# Altium PCB AMS1117 breakout.PcbDoc
Units mm, origin at the board's own origin, x right, y up, seen from the top; angles counter-clockwise.
Board outline 152.4 x 101.6 mm, 2 copper layers (Top Layer, Bottom Layer); 6 components, 4 nets, 13 pads, 0 vias.
Unrouted connection lines stored in the file: 9.
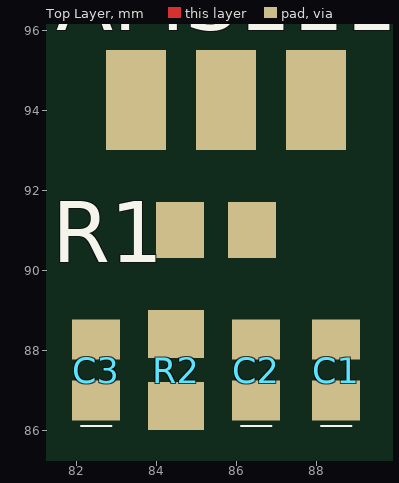
[diagram p0: Top Layer view]
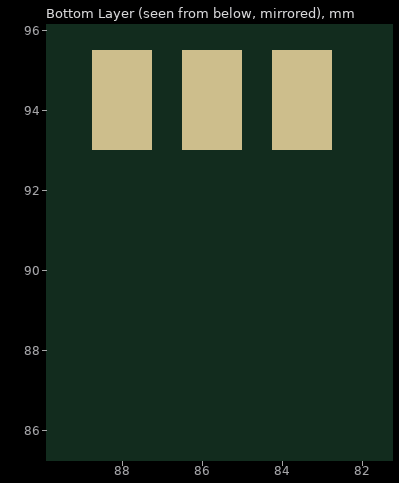
[diagram p1: Bottom Layer view, seen from below]

## Layer stack, top to bottom
Top Solder: solder mask 0.0102, Solder Resist, Dk 3.5
Top Layer: signal copper 0.0356
Dielectric 1: dielectric 0.32, FR-4, Dk 4.8
Bottom Layer: signal copper 0.0356
Bottom Solder: solder mask 0.0102, Solder Resist, Dk 3.5

## Board outline
25.4,25.4 177.8,25.4 177.8,127 25.4,127

## Design rules (kind name [scope] priority, off if disabled: settings)
Clearance [All] p1: gap=0.254
PolygonConnect [All] p1: connectstyle=Relief reliefconductorwidth=0.254 reliefentries=4 polygonreliefangle="90 Angle" airgapwidth=0.254
RoomDefinition "AMS1117 breakout" [InComponentClass('AMS1117 breakout')] p1: confinementstyle=ConfineIn formatcopy=TRUE lockcomponents=FALSE outline 178.943,26.797 189.23,26.797 189.23,37.846 178.943,37.846
RoutingVias [All] p1: holewidth=0.711 width=1.27 viastyle="Through Hole" minholewidth=0.711 minwidth=1.27 maxholewidth=0.711 maxwidth=1.27
SolderMaskExpansion [All] p1: expansion=0.102
UnpouredPolygon [All] p1: allowunpoured=FALSE
Width [All] p1: maxlimit=0.254 minlimit=0.254 preferedwidth=0.254
29 further rules are at their usual default settings.

## Components (designator, comment, footprint, x,y, rotation, side; value= is the part's Value field where it differs from the comment)
AMS1117 "T1" SOT-223 82.5,93.5 r0 top
C1 "22uF" 0805-C 88.5,87.5 r90 top
C2 "22uF" 0805-C 86.5,87.5 r90 top
C3 "10uF" 0805-C 82.5,87.5 r90 top
R1 "47k" 0805-R 85.5,91 r0 top
R2 "27k" 0805-R 84.5,87.5 r90 top

## Footprints (in the part's own frame and the unit in brackets; to place one, negate y for a bottom-side part, rotate by r counter-clockwise, add the part's x,y. Pads: shape width x height; smd on the part's side, far side on the other; paste and mask are expansions set on the pad)
0805-C [mm]
  rect 1x1.2 smd mask+0.01: 1(-0.762,0) 2(0.762,0)
  silkscreen extent -1.4,-0.38 -1.4,0.38, body extent -1,-0.62 1,0.63, height 0.78
0805-R [mm] "Resistor 0805 / 2012 (2.0 x 1.2 mm)"
  rect 1.2x1.4 smd: 1(-0.9,0) 2(0.9,0)
  body extent -1,-0.62 1,0.62, height 0.45
SOT-223 [mm]
  rect 1.5x2.5 all layers, no hole: 1(1,0.75) 2(3.25,0.75) 3(5.5,0.75)
  Top Layer region: 1.25,4.5 5.25,4.5 5.25,7.5 1.25,7.5
  body extent 0,0 6.5,6.89, height 1.6

## Part data
AMS1117: library part AMS1117
C1 C2 C3: library part Capacitor
R1 R2: library part Resistor

## Nets (pads, with @x,y where several pads share a name; then routed paths per layer and width w, separated by ;. In a path a pad name is that pad's centre, name@x,y a point inside that pad or via, vN(x,y) a via of type N, cw(c..) or ccw(c..) an arc to the next point about the centre after c; other vN are vias at no path point)
NetAMS1117_1: AMS1117.1 C3.2 R1.1 R2.2
NetAMS1117_2: AMS1117.2 C2.2 R1.2
NetAMS1117_3: AMS1117.3 C1.2
NetC1_1: C1.1 C2.1 C3.1 R2.1